# Altium PCB afstandbediening.PcbDoc (part 1 of 2)
Units mm, origin at the board's own origin, x right, y up, seen from the top; angles counter-clockwise.
Board outline 97 x 86 mm, 2 copper layers (Top Layer, Bottom Layer), stack 1.671 mm thick; 45 components, 45 nets, 242 pads, 62 vias.
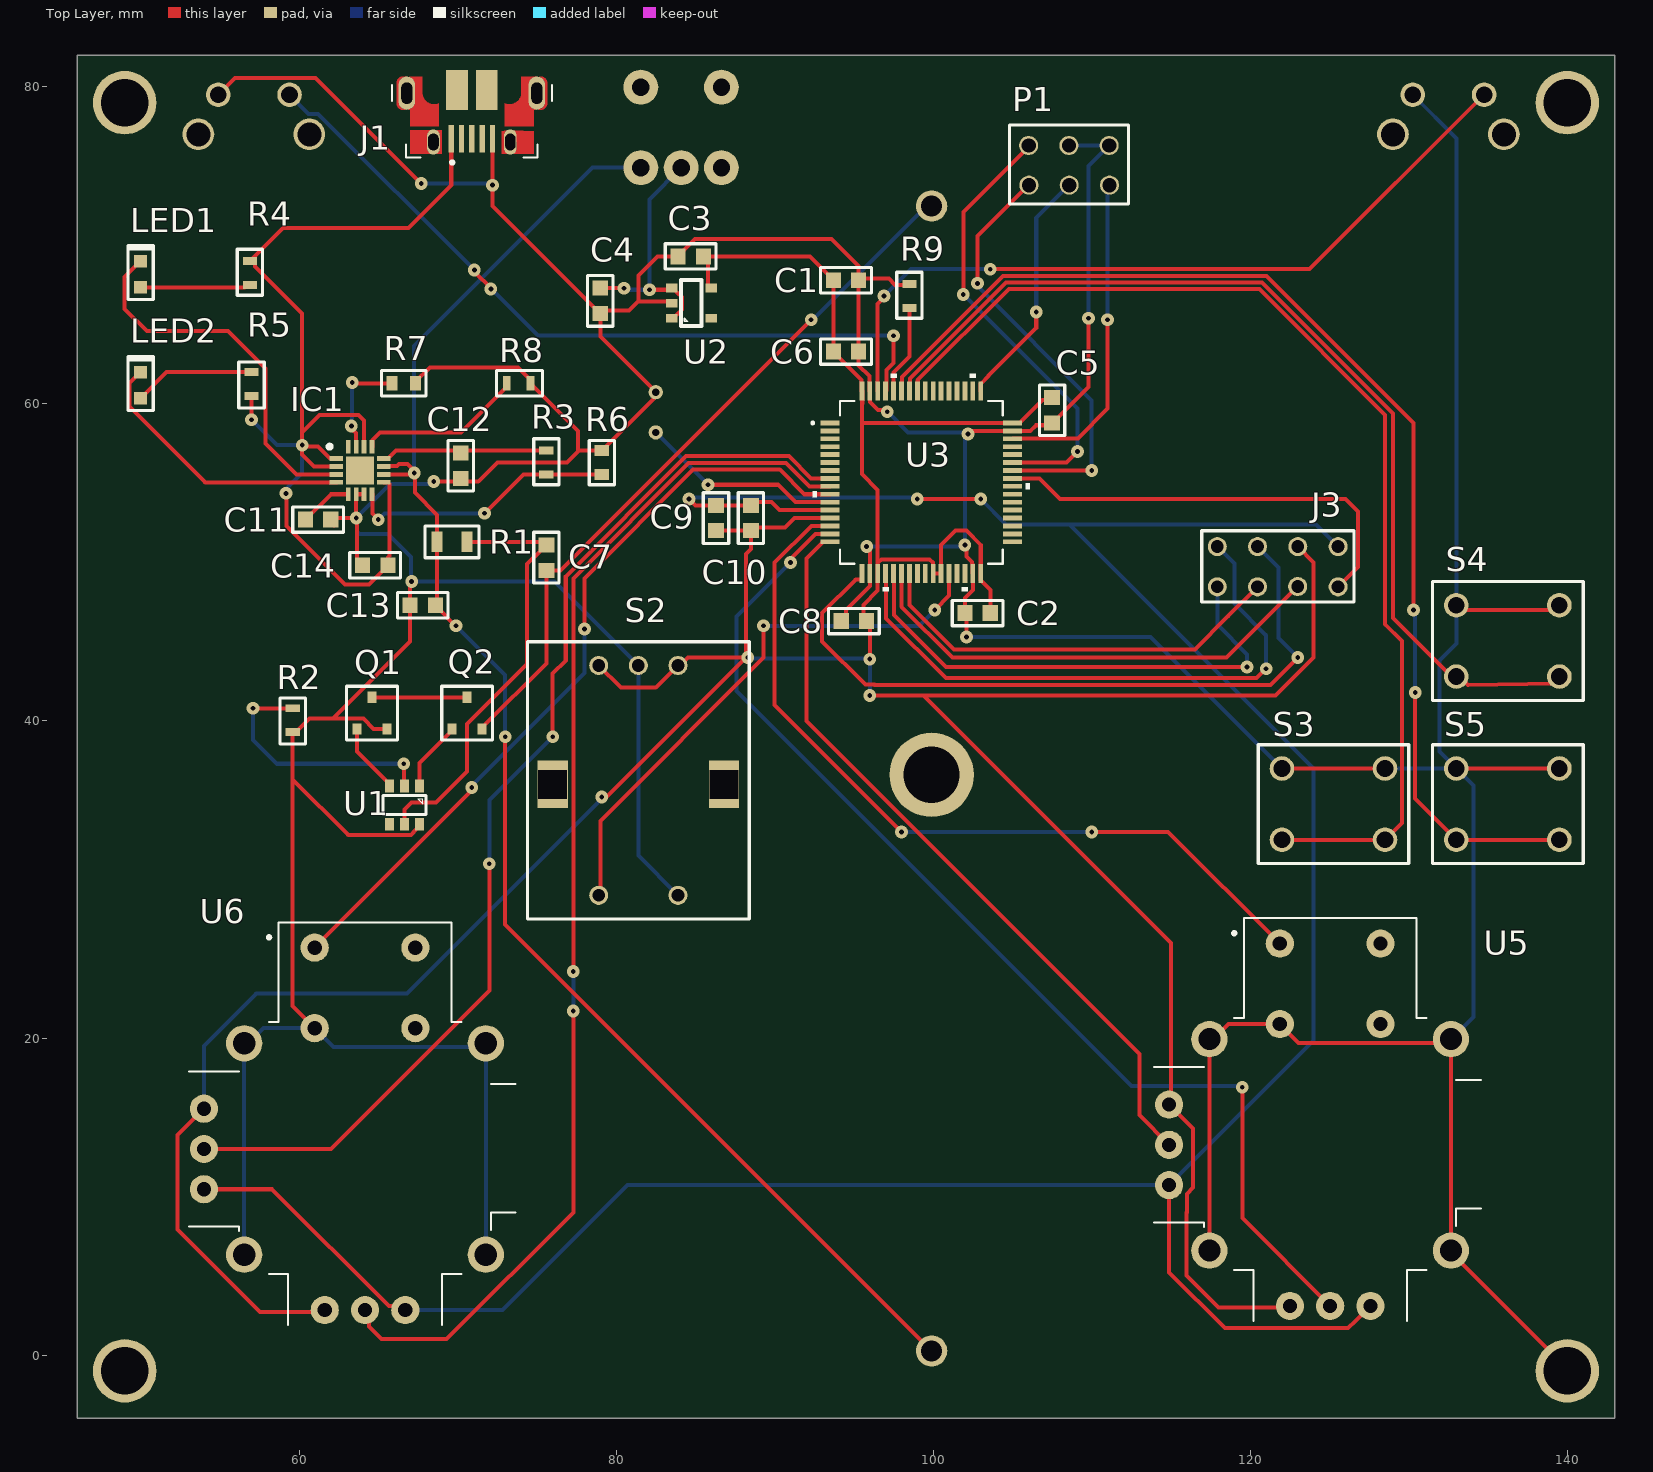
[diagram p0: Top Layer view]
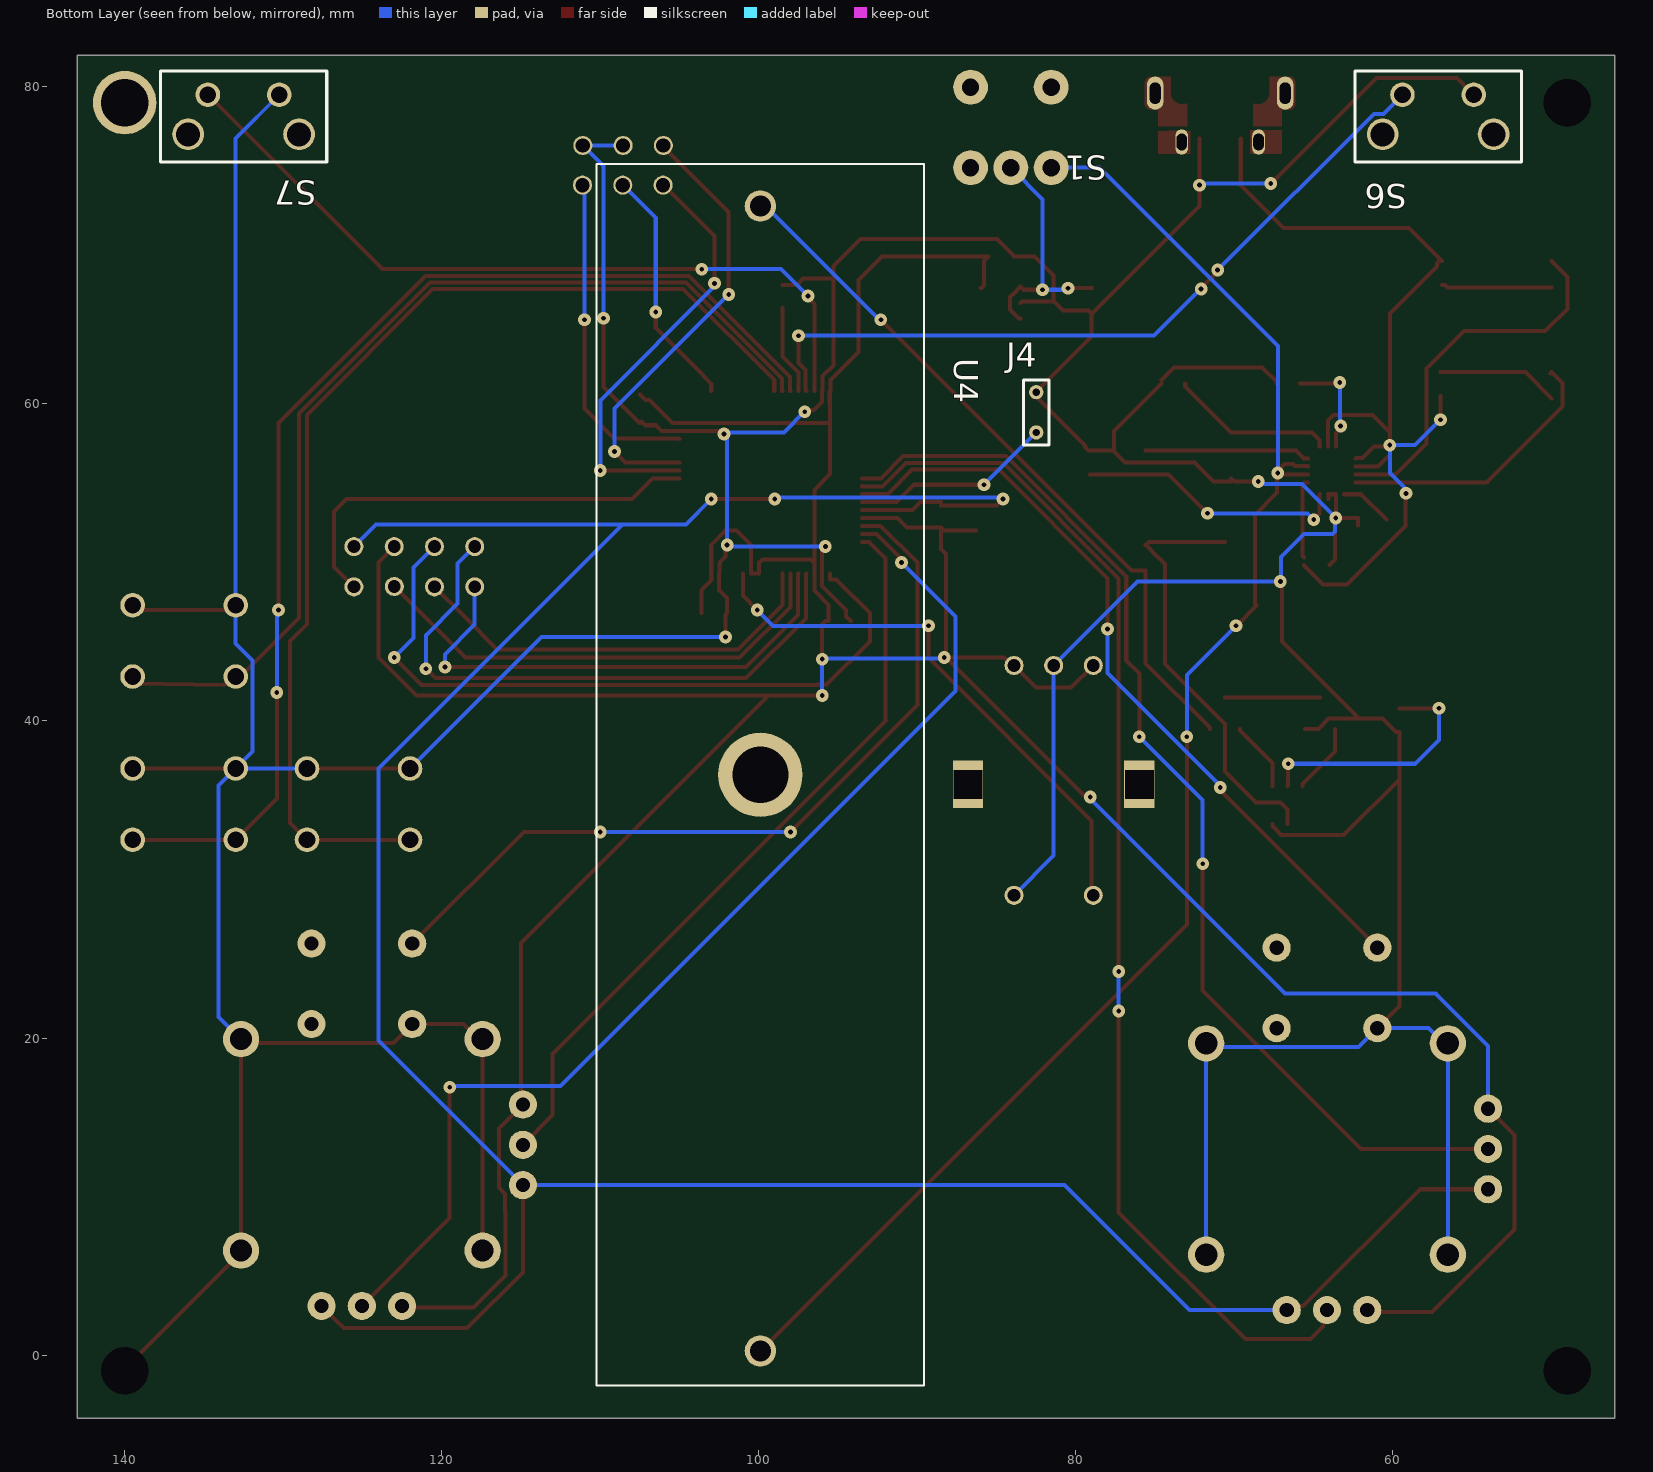
[diagram p1: Bottom Layer view, seen from below]

## Layer stack, top to bottom
Top Solder: solder mask 0.0102, Solder Resist, Dk 3.5
Top Layer: signal copper 0.0356
Dielectric 1: dielectric 1.6, FR-4, Dk 4.8
Bottom Layer: signal copper 0.0356
Bottom Solder: solder mask 0.0102, Solder Resist, Dk 3.5

## Board outline
46,82 143,82 143,-4 142,-4 46,-4

## Design rules (kind name [scope] priority, off if disabled: settings)
Clearance [All] p1: gap=0.168 ignorepadtopadclearanceinfootprint=FALSE
HoleSize [All] p1: absolutevalues=TRUE maxlimit=4 minlimit=0.025 maxpercent=80.000 minpercent=20.000
MinimumSolderMaskSliver [All] p1: minsoldermaskwidth=0.1
PolygonConnect [All] p1: connectstyle=Relief reliefconductorwidth=0.254 reliefentries=4 polygonreliefangle="90 Angle" airgapwidth=0.254
RoutingVias [All] p1: holewidth=0.3 width=0.8 viastyle="Through Hole" minholewidth=0.3 minwidth=0.8 maxholewidth=5 maxwidth=5
SilkToSolderMaskClearance [IsPad] p1: minsilkscreentomaskgap=0.1 clearancetoexposedcopper=TRUE
SolderMaskExpansion [All] p1: expansion=0.102 istentingtop=FALSE
Width [All] p1: maxlimit=5 minlimit=0.168 preferedwidth=0.254
27 further rules are at their usual default settings.

## Components (designator, comment, footprint, x,y, rotation, side; value= is the part's Value field where it differs from the comment)
C1 "4.7µF" 0603 94.5,67.8 r180 top
C2 "0.1µF" 0603 102.8,46.8 r0 top
C3 "1µF" 0603 84.7,69.3 r180 top
C4 "1µF" 0603 79,66.5 r270 top
C5 "0.1µF" 0603 107.5,59.6 r90 top
C6 "0.1µF" 0603 94.5,63.3 r180 top
C7 "0.1µF" 0603 75.6,50.3 r90 top
C8 "0.1µF" 0603 95,46.3 r0 top
C9 "1µF" 0603 86.3,52.8 r270 top
C10 "10nF" 0603 88.5,52.8 r270 top
C11 "10nF" 0603 61.2,52.7 r180 top
C12 "1µF" 0603 70.2,56.1 r90 top
C13 "4.7µF" 0603 67.8,47.3 r0 top
C14 "1µF" 0603 64.8,49.825 r0 top
IC1 "L6924UTR" QFN50P300X300X100-17N-D 63.85,55.8 r0 top
J1 "10103592-0001LF" AMPHENOL_10103592-0001LF 70.9,79.6 r180 top
J3 "NRF connector" "8 PIN RF" 125.54,51 r180 top
J4 "connector piëzo" "M20-9770246 - DUPLICATE" 82.5,58.2 r90 bottom
LED1 "20mA" KP-1608QBC-D 50,68.175 r270 top
LED2 "20mA" KP-1608QBC-D 50,61.175 r270 top
P1 "program connector" M20-9980345 111.12,73.8 r180 top
Q1 "powermosfet" "SI2336DS-T1-GE3 - DUPLICATE" 64.6,39.492 r0 top
Q2 "powermosfet" "SI2336DS-T1-GE3 - DUPLICATE" 70.6,39.492 r0 top
R1 "330ohm" "MCWR08 - DUPLICATE" 69.65,51.3 r180 top
R2 "2.7K" CRCW0603 59.6,40.05 r90 top
R3 "1K" CRCW0603 75.6,56.3 r270 top
R4 "120 ohm" CRCW0603 56.9,68.25 r270 top
R5 "120 ohm" CRCW0603 57,61.25 r90 top
R6 "499ohm" MCWR06 79.1,56.3 r270 top
R7 "24K" MCWR06 66.6,61.3 r0 top
R8 "1K" CRCW0603 73.85,61.3 r180 top
R9 "5Kohm" ERJ-2RK 98.5,66.8 r270 top
S1 "power switch" T101MH9ABE 81.56,79.98 r0 bottom
S2 "rotary encoder" EC11E15244B2 81.4,43.5 r180 top
S3 "switch" B3F-1070 122,32.5 r0 top
S4 "switch" B3F-1070 133,42.8 r0 top
S5 "switch" B3F-1070 133,32.5 r0 top
S6 "90° switch pinker" "B3F-3120 - DUPLICATE" 59.4,79.5 r0 bottom
S7 "90° switch pinker" "B3F-3120 - DUPLICATE" 134.75,79.5 r0 bottom
U1 "safety chip" AP9101CK6-AETRG1 67.6,35.892 r180 top
U2 "LDO" NCP164C 83.5,65.4 r90 top
U3 "STM32F303R8T6" LQFP64-10x10mm 99.25,55.05 r0 top
U4 "1043P" 1043P 99.9,36.6 r90 bottom
U5 "COM-09032" XDCR_COM-09032 125.04,13.26 r0 top
U6 "COM-09032" XDCR_COM-09032 64.16,13 r0 top

## Footprints (in the part's own frame and the unit in brackets; to place one, negate y for a bottom-side part, rotate by r counter-clockwise, add the part's x,y. Pads: shape width x height; smd on the part's side, far side on the other; paste and mask are expansions set on the pad)
"8 PIN RF" [mm]
  round 1.2 hole 0.8: 1(0,2.54) 2(2.55,2.52) 3(5.08,2.54) 4(7.62,2.54) 5(7.62,0) 6(5.08,0) 7(2.54,0) 8(0,0)
  silkscreen extent -1,-1 8.6,3.5
0603 [mm]
  rect 0.95x1 smd: 1(-0.8,0) 2(0.8,0)
  silkscreen extent -1.6,-0.8 1.6,0.8
1043P [mm]
  round 1.98 hole 1.32: 1(-36.34,0) 2(35.88,0)
  round 5.325 hole 3.55: 3(0,0)
  silkscreen extent -38.53,-10.33 38.53,10.33, body extent -38.53,-10.33 38.53,10.33, height 14.1
AMPHENOL_10103592-0001LF [mm]
  rect 0.33x1.75 smd: 1(1.3,2.875) 2(0.65,2.875) 3(0,2.875) 4(-0.65,2.875) 5(-1.3,2.875)
  oval 0.8x1.6 hole 0.65 slot 1.05 at 90 deg: P1(-2.425,3.08) P2(2.425,3.08)
  oval 1.05x2.1 hole 0.7 slot 1.34 at 90 deg: P3(-4.1,0) P6(4.1,0)
  rect 1.375x2.5 smd: P4(-0.937,-0.2) P5(0.937,-0.2)
  Top Layer region: -4.13,1.045 -4.16,1.043 -4.185,1.04 -4.21,1.035 -4.235,1.03 -4.259,1.023 -4.283,1.015 -4.307,1.005 -4.33,0.995 -4.352,0.983 -4.374,0.971 -4.396,0.957 -4.416,0.942 -4.436,0.926 -4.455,0.91 -4.473,0.892 -4.491,0.874 -4.507,0.854 -4.523,0.834 -4.537,0.813 -4.55,0.792 -4.563,0.769 -4.574,0.747 -4.584,0.723 -4.593,0.7 -4.6,0.675 -4.607,0.651 -4.612,0.626 -4.616,0.601 -4.619,0.576 -4.62,0.555 -4.62,-0.525 -4.619,-0.555 -4.617,-0.582 -4.614,-0.608 -4.609,-0.635 -4.602,-0.661 -4.595,-0.687 -4.586,-0.713 -4.575,-0.738 -4.564,-0.762 -4.551,-0.786 -4.537,-0.809 -4.521,-0.832 -4.505,-0.853 -4.487,-0.874 -4.468,-0.893 -4.449,-0.912 -4.428,-0.93 -4.407,-0.946 -4.384,-0.962 -4.361,-0.976 -4.337,-0.989 -4.313,-1 -4.288,-1.011 -4.262,-1.02 -4.236,-1.027 -4.21,-1.034 -4.183,-1.039 -4.157,-1.042 -4.13,-1.044 -4.105,-1.045 -4.105,-1.05 -4.33,-1.05 -4.352,-1.049 -4.374,-1.048 -4.396,-1.045 -4.417,-1.041 -4.439,-1.036 -4.46,-1.029 -4.481,-1.022 -4.501,-1.014 -4.521,-1.004 -4.54,-0.994 -4.559,-0.982 -4.577,-0.97 -4.594,-0.956 -4.611,-0.942 -4.627,-0.927 -4.642,-0.911 -4.656,-0.894 -4.67,-0.877 -4.682,-0.859 -4.694,-0.84 -4.704,-0.821 -4.714,-0.801 -4.722,-0.781 -4.729,-0.76 -4.736,-0.739 -4.741,-0.717 -4.745,-0.696 -4.748,-0.674 -4.749,-0.652 -4.75,-0.63 -4.75,0.63 -4.749,0.652 -4.748,0.674 -4.745,0.696 -4.741,0.717 -4.736,0.739 -4.729,0.76 -4.722,0.781 -4.714,0.801 -4.704,0.821 -4.694,0.84 -4.682,0.859 -4.67,0.877 -4.656,0.894 -4.642,0.911 -4.627,0.927 -4.611,0.942 -4.594,0.956 -4.577,0.97 -4.559,0.982 -4.54,0.994 -4.521,1.004 -4.501,1.014 -4.481,1.022 -4.46,1.029 -4.439,1.036 -4.417,1.041 -4.396,1.045 -4.374,1.048 -4.352,1.049 -4.33,1.05 -4.13,1.05
  Top Layer region: -2.075,0.64 -2.115,0.656 -2.161,0.671 -2.207,0.684 -2.254,0.693 -2.302,0.699 -2.35,0.703 -2.398,0.703 -2.446,0.7 -2.493,0.694 -2.541,0.685 -2.587,0.673 -2.633,0.658 -2.677,0.64 -2.721,0.619 -2.763,0.596 -2.803,0.57 -2.841,0.541 -2.878,0.51 -2.913,0.477 -2.945,0.442 -2.975,0.404 -3.003,0.365 -3.028,0.324 -3.051,0.281 -3.07,0.238 -3.087,0.193 -3.101,0.147 -3.112,0.1 -3.12,0.053 -3.125,0 -3.125,-1.05 -4.06,-1.05 -4.06,-1.045 -4.03,-1.042 -4.005,-1.038 -3.979,-1.032 -3.954,-1.026 -3.93,-1.018 -3.906,-1.009 -3.882,-0.998 -3.859,-0.987 -3.837,-0.975 -3.815,-0.961 -3.794,-0.946 -3.773,-0.931 -3.754,-0.914 -3.735,-0.896 -3.717,-0.878 -3.7,-0.858 -3.684,-0.838 -3.669,-0.817 -3.655,-0.795 -3.642,-0.773 -3.631,-0.75 -3.62,-0.726 -3.611,-0.702 -3.603,-0.678 -3.596,-0.653 -3.59,-0.628 -3.586,-0.603 -3.583,-0.577 -3.581,-0.551 -3.58,-0.53 -3.585,0.555 -3.586,0.576 -3.589,0.601 -3.593,0.626 -3.598,0.651 -3.605,0.675 -3.612,0.7 -3.621,0.723 -3.631,0.747 -3.642,0.769 -3.655,0.792 -3.668,0.813 -3.682,0.834 -3.698,0.854 -3.714,0.874 -3.732,0.892 -3.75,0.91 -3.769,0.926 -3.789,0.942 -3.809,0.957 -3.831,0.971 -3.853,0.983 -3.875,0.995 -3.898,1.005 -3.922,1.015 -3.946,1.023 -3.97,1.03 -3.995,1.035 -4.02,1.04 -4.045,1.043 -4.075,1.045 -4.075,1.05 -3.9,1.05 -3.9,2.1 -2.075,2.1
  Top Layer region: 4.352,1.049 4.374,1.048 4.396,1.045 4.417,1.041 4.439,1.036 4.46,1.029 4.481,1.022 4.501,1.014 4.521,1.004 4.54,0.994 4.559,0.982 4.577,0.97 4.594,0.956 4.611,0.942 4.627,0.927 4.642,0.911 4.656,0.894 4.67,0.877 4.682,0.859 4.694,0.84 4.704,0.821 4.714,0.801 4.722,0.781 4.729,0.76 4.736,0.739 4.741,0.717 4.745,0.696 4.748,0.674 4.749,0.652 4.75,0.63 4.75,-0.63 4.749,-0.652 4.748,-0.674 4.745,-0.696 4.741,-0.717 4.736,-0.739 4.729,-0.76 4.722,-0.781 4.714,-0.801 4.704,-0.821 4.694,-0.84 4.682,-0.859 4.67,-0.877 4.656,-0.894 4.642,-0.911 4.627,-0.927 4.611,-0.942 4.594,-0.956 4.577,-0.97 4.559,-0.982 4.54,-0.994 4.521,-1.004 4.501,-1.014 4.481,-1.022 4.46,-1.029 4.439,-1.036 4.417,-1.041 4.396,-1.045 4.374,-1.048 4.352,-1.049 4.33,-1.05 4.105,-1.05 4.105,-1.045 4.13,-1.044 4.157,-1.042 4.183,-1.039 4.21,-1.034 4.236,-1.027 4.262,-1.02 4.288,-1.011 4.313,-1 4.337,-0.989 4.361,-0.976 4.384,-0.962 4.407,-0.946 4.428,-0.93 4.449,-0.912 4.468,-0.893 4.487,-0.874 4.505,-0.853 4.521,-0.832 4.537,-0.809 4.551,-0.786 4.564,-0.762 4.575,-0.738 4.586,-0.713 4.595,-0.687 4.602,-0.661 4.609,-0.635 4.614,-0.608 4.617,-0.582 4.619,-0.555 4.62,-0.525 4.62,0.555 4.619,0.576 4.616,0.601 4.612,0.626 4.607,0.651 4.6,0.675 4.593,0.7 4.584,0.723 4.574,0.747 4.563,0.769 4.55,0.792 4.537,0.813 4.523,0.834 4.507,0.854 4.491,0.874 4.473,0.892 4.455,0.91 4.436,0.926 4.416,0.942 4.396,0.957 4.374,0.971 4.352,0.983 4.33,0.995 4.307,1.005 4.283,1.015 4.259,1.023 4.235,1.03 4.21,1.035 4.185,1.04 4.16,1.043 4.13,1.045 4.13,1.05 4.33,1.05
  Top Layer region: 3.9,1.05 4.075,1.05 4.075,1.045 4.045,1.043 4.02,1.04 3.995,1.035 3.97,1.03 3.946,1.023 3.922,1.015 3.898,1.005 3.875,0.995 3.853,0.983 3.831,0.971 3.809,0.957 3.789,0.942 3.769,0.926 3.75,0.91 3.732,0.892 3.714,0.874 3.698,0.854 3.682,0.834 3.668,0.813 3.655,0.792 3.642,0.769 3.631,0.747 3.621,0.723 3.612,0.7 3.605,0.675 3.598,0.651 3.593,0.626 3.589,0.601 3.586,0.576 3.585,0.555 3.58,-0.53 3.581,-0.551 3.583,-0.577 3.586,-0.603 3.59,-0.628 3.596,-0.653 3.603,-0.678 3.611,-0.702 3.62,-0.726 3.631,-0.75 3.642,-0.773 3.655,-0.795 3.669,-0.817 3.684,-0.838 3.7,-0.858 3.717,-0.878 3.735,-0.896 3.754,-0.914 3.773,-0.931 3.794,-0.946 3.815,-0.961 3.837,-0.975 3.859,-0.987 3.882,-0.998 3.906,-1.009 3.93,-1.018 3.954,-1.026 3.979,-1.032 4.005,-1.038 4.03,-1.042 4.06,-1.045 4.06,-1.05 3.125,-1.05 3.125,0 3.12,0.053 3.112,0.1 3.101,0.147 3.087,0.193 3.07,0.238 3.051,0.281 3.028,0.324 3.003,0.365 2.975,0.404 2.945,0.442 2.913,0.477 2.878,0.51 2.841,0.541 2.803,0.57 2.763,0.596 2.721,0.619 2.677,0.64 2.633,0.658 2.587,0.673 2.541,0.685 2.493,0.694 2.446,0.7 2.398,0.703 2.35,0.703 2.302,0.699 2.254,0.693 2.207,0.684 2.161,0.671 2.115,0.656 2.075,0.64 2.075,2.1 3.9,2.1
  Top Layer region: 2.2,3.79 2.191,3.785 2.183,3.78 2.175,3.775 2.168,3.77 2.16,3.765 2.153,3.76 2.146,3.754 2.139,3.748 2.132,3.742 2.126,3.736 2.119,3.729 2.113,3.722 2.107,3.716 2.101,3.709 2.096,3.701 2.09,3.694 2.085,3.687 2.08,3.679 2.076,3.671 2.071,3.663 2.067,3.655 2.063,3.647 2.059,3.639 2.056,3.63 2.052,3.622 2.049,3.613 2.046,3.605 2.044,3.596 2.042,3.587 2.04,3.58 2.03,2.61 2.032,2.597 2.035,2.587 2.037,2.576 2.04,2.566 2.044,2.555 2.047,2.545 2.051,2.535 2.055,2.525 2.06,2.515 2.064,2.505 2.069,2.495 2.075,2.486 2.08,2.477 2.086,2.467 2.092,2.458 2.099,2.45 2.105,2.441 2.112,2.433 2.119,2.424 2.127,2.416 2.134,2.408 2.142,2.401 2.15,2.394 2.158,2.386 2.167,2.38 2.175,2.373 2.184,2.367 2.193,2.36 2.202,2.355 2.21,2.35 1.9,2.35 1.9,3.81 2.2,3.81
  Top Layer region: 3.9,2.35 2.61,2.35 2.619,2.354 2.628,2.359 2.637,2.364 2.647,2.37 2.656,2.376 2.665,2.382 2.673,2.388 2.682,2.395 2.69,2.401 2.698,2.408 2.706,2.416 2.714,2.423 2.722,2.431 2.729,2.439 2.736,2.447 2.743,2.455 2.749,2.464 2.755,2.472 2.761,2.481 2.767,2.49 2.773,2.5 2.778,2.509 2.783,2.519 2.788,2.528 2.792,2.538 2.796,2.548 2.8,2.558 2.804,2.568 2.807,2.578 2.81,2.59 2.82,3.55 2.819,3.559 2.817,3.57 2.814,3.58 2.812,3.591 2.809,3.601 2.806,3.611 2.802,3.621 2.799,3.631 2.795,3.641 2.79,3.651 2.786,3.661 2.781,3.67 2.776,3.68 2.77,3.689 2.764,3.698 2.758,3.707 2.752,3.715 2.746,3.724 2.739,3.732 2.732,3.74 2.725,3.748 2.718,3.756 2.71,3.764 2.702,3.771 2.694,3.778 2.686,3.785 2.677,3.791 2.669,3.798 2.66,3.804 2.65,3.81 3.9,3.81
  Top Layer region: -1.9,2.401 -2.21,2.35 -2.193,2.36 -2.175,2.373 -2.158,2.386 -2.142,2.401 -2.127,2.416 -2.112,2.433 -2.099,2.45 -2.086,2.467 -2.075,2.486 -2.064,2.505 -2.055,2.525 -2.047,2.545 -2.04,2.566 -2.035,2.587 -2.03,2.61 -2.04,3.58 -2.044,3.596 -2.049,3.613 -2.056,3.63 -2.063,3.647 -2.071,3.663 -2.08,3.679 -2.09,3.694 -2.101,3.709 -2.113,3.722 -2.126,3.736 -2.139,3.748 -2.153,3.76 -2.168,3.77 -2.183,3.78 -2.2,3.79 -2.2,3.81 -1.9,3.81
  Top Layer region: -2.65,3.81 -2.677,3.791 -2.694,3.778 -2.71,3.764 -2.725,3.748 -2.739,3.732 -2.752,3.715 -2.764,3.698 -2.776,3.68 -2.786,3.661 -2.795,3.641 -2.802,3.621 -2.809,3.601 -2.814,3.58 -2.819,3.559 -2.81,2.59 -2.804,2.568 -2.796,2.548 -2.788,2.528 -2.778,2.509 -2.767,2.49 -2.755,2.472 -2.743,2.455 -2.729,2.439 -2.714,2.423 -2.698,2.408 -2.682,2.395 -2.665,2.382 -2.647,2.37 -2.628,2.359 -2.61,2.35 -3.9,2.395 -3.9,3.81
  silkscreen extent -5.04,-0.5 5.04,4.47
AP9101CK6-AETRG1 [mm]
  rect 0.55x0.8 smd: 1(0,0) 2(0.95,0) 3(1.9,0) 4(1.9,2.4) 5(0.95,2.4) 6(0,2.4)
  silkscreen extent -0.4,0.6 2.3,1.8
B3F-1070 [mm]
  round 1.55 hole 1.05: 1(6.5,0) 2(0,0) 3(6.5,4.5) 4(0,4.5)
  silkscreen extent -1.5,-1.5 8,6
"B3F-3120 - DUPLICATE" [mm]
  round 1.55 hole 1.05: 1(-4.5,0) 2(0,0)
  round 2 hole 1.52: 3(1.25,2.5) 4(-5.75,2.5)
  silkscreen extent -7.5,-1.5 3,4.25
CRCW0603 [mm]
  rect 0.5x0.9 smd: 1(-0.75,0) 2(0.75,0)
  silkscreen extent -1.5,-0.8 1.4,0.8
EC11E15244B2 [mm]
  round 1.2 hole 0.8: 1(-2.5,0) 2(2.5,0) 3(0,0) 4(-2.5,14.5) 5(2.5,14.5)
  rect 1.9x3 hole 1.8 square: 6(5.4,7.5) 7(-5.4,7.5)
  silkscreen extent -7,-1.5 7,16
ERJ-2RK [mm]
  rect 0.5x0.9 smd: 1(-0.75,0) 2(0.75,0)
  silkscreen extent -1.5,-0.8 1.4,0.8
KP-1608QBC-D [mm]
  rect 0.8x0.8 smd: 1(-0.825,0) 2(0.825,0)
  silkscreen extent -1.8,-0.8 1.6,0.8
LQFP64-10x10mm [mm]
  rect 1.194x0.305 smd paste+0 mask+0: 1(-5.75,3.75) 2(-5.75,3.25) 3(-5.75,2.75) 4(-5.75,2.25) 5(-5.75,1.75) 6(-5.75,1.25) 7(-5.75,0.75) 8(-5.75,0.25) 9(-5.75,-0.25) 10(-5.75,-0.75) 11(-5.75,-1.25) 12(-5.75,-1.75) 13(-5.75,-2.25) 14(-5.75,-2.75) 15(-5.75,-3.25) 16(-5.75,-3.75) 33(5.75,-3.75) 34(5.75,-3.25) 35(5.75,-2.75) 36(5.75,-2.25) 37(5.75,-1.75) 38(5.75,-1.25) 39(5.75,-0.75) 40(5.75,-0.25) 41(5.75,0.25) 42(5.75,0.75) 43(5.75,1.25) 44(5.75,1.75) 45(5.75,2.25) 46(5.75,2.75) 47(5.75,3.25) 48(5.75,3.75)
  rect 0.305x1.194 smd paste+0 mask+0: 17(-3.75,-5.75) 18(-3.25,-5.75) 19(-2.75,-5.75) 20(-2.25,-5.75) 21(-1.75,-5.75) 22(-1.25,-5.75) 23(-0.75,-5.75) 24(-0.25,-5.75) 25(0.25,-5.75) 26(0.75,-5.75) 27(1.25,-5.75) 28(1.75,-5.75) 29(2.25,-5.75) 30(2.75,-5.75) 31(3.25,-5.75) 32(3.75,-5.75) 49(3.75,5.75) 50(3.25,5.75) 51(2.75,5.75) 52(2.25,5.75) 53(1.75,5.75) 54(1.25,5.75) 55(0.75,5.75) 56(0.25,5.75) 57(-0.25,5.75) 58(-0.75,5.75) 59(-1.25,5.75) 60(-1.75,5.75) 61(-2.25,5.75) 62(-2.75,5.75) 63(-3.25,5.75) 64(-3.75,5.75)
  silkscreen extent -6.93,-6.85 6.85,6.85, body extent 0,0 0.25,0.25, height 0.25
"M20-9770246 - DUPLICATE" [mm]
  round 0.9 hole 0.46: 1(0,0) 2(2.54,0)
  silkscreen extent -0.8,-0.8 3.3,0.8
M20-9980345 [mm]
  round 1.2 hole 0.9: 1(0,0) 2(2.54,0) 3(5.08,0) 4(5.1,-2.5) 5(2.56,-2.5) 6(0.02,-2.5)
  silkscreen extent -1.2,-3.8 6.3,1.2
MCWR06 [mm]
  rect 0.7x0.9 smd: 1(-0.75,0) 2(0.75,0)
  silkscreen extent -1.4,-0.8 1.4,0.8
"MCWR08 - DUPLICATE" [mm]
  rect 0.7x1.3 smd: 1(-0.95,0) 2(0.95,0)
  silkscreen extent -1.7,-1 1.7,1
NCP164C [mm] "LDO"
  rect 0.56x0.72 smd: 1(0,0) 2(0.95,0) 3(1.9,0) 4(0,-2.5) 5(1.9,-2.5)
  silkscreen extent -0.5,-1.9 2.4,-0.6
QFN50P300X300X100-17N-D [mm]
  rect 0.85x0.3 smd: 1(-1.5,0.75) 2(-1.5,0.25) 3(-1.5,-0.25) 4(-1.5,-0.75) 9(1.5,-0.75) 10(1.5,-0.25) 11(1.5,0.25) 12(1.5,0.75)
  rect 0.3x0.85 smd: 5(-0.75,-1.5) 6(-0.25,-1.5) 7(0.25,-1.5) 8(0.75,-1.5) 13(0.75,1.5) 14(0.25,1.5) 15(-0.25,1.5) 16(-0.75,1.5)
  rect 1.75x1.75 smd: 17(0,0)
  silkscreen extent -2.05,1.38 -1.8,1.62, body extent -1.55,-1.55 1.55,1.55, height 1
"SI2336DS-T1-GE3 - DUPLICATE" [mm]
  rect 0.56x0.72 smd: 1(-0.95,0) 2(0.95,0) 3(0,2)
  silkscreen extent -1.6,-0.7 1.6,2.7
T101MH9ABE [mm]
  round 2.2 hole 1.09: 1(0,5.08) 2(2.54,5.08) 3(5.08,5.08) 4(0,0) 5(5.08,0)
XDCR_COM-09032 [mil]
  round 70 hole 35.43: B1A(-125,500) B1B(125,500) B2A(-125,300) B2B(125,300)
  round 70 hole 35: H1(-100,-400) H2(0,-400) H3(100,-400) V1(-400,100) V2(-400,0) V3(-400,-100)
  round 90 hole 55: S1(-300,262.5) S2(-300,-262.5) S3(300,-262.5) S4(300,262.5)
  silkscreen extent -437,-437 374,563

## Part data
C1 C13: library part 0603ZD475KAT2A, "AVX - 0603ZD475KAT2A - SMD Multilayer Ceramic Capacitor, 4.7 µF, 10 V, 0603 [1608 Metric], ± 10%, X5R, AVX 0603 MLCC", Capacitance=4.7uF, Case Code (Imperial)=0603, Case Code (Metric)=1608, Dielectric=X5R, Manufacturer="Kyocera AVX", Max Operating Temperature=85°C, Min Operating Temperature=-55°C, Package Quantity=1, Supplier Part Number 1=1833806, Tolerance=10%, Voltage=10V, Case/Package=0603, Category="Ceramic Capacitors", ComponentLink1Description=https://datasheet.ciiva.com/1458/1796776-1458211.pdf?src-supplier=Element14, ComponentLink1URL=https://datasheet.ciiva.com/1458/1796776-1458211.pdf?src-supplier=Element14, ComponentLink2Description=https://datasheet.ciiva.com/15212/getdatasheetpartid-179504-15212405.pdf?src-supplier=Verical, ComponentLink2URL=https://datasheet.ciiva.com/15212/getdatasheetpartid-179504-15212405.pdf?src-supplier=Verical, ComponentLink3Description=https://datasheet.ciiva.com/11570/cx5r-11570838.pdf?src-supplier=Avnet, ComponentLink3URL=https://datasheet.ciiva.com/11570/cx5r-11570838.pdf?src-supplier=Avnet, ComponentLink4Description=https://datasheet.ciiva.com/6269/cx5r-6269191.pdf?src-supplier=Digi-Key, ComponentLink4URL=https://datasheet.ciiva.com/6269/cx5r-6269191.pdf?src-supplier=Digi-Key, ComponentLink5Description=https://datasheet.ciiva.com/14905/cx5r-14905225.pdf?src-supplier=Digi-Key, ComponentLink5URL=https://datasheet.ciiva.com/14905/cx5r-14905225.pdf?src-supplier=Digi-Key, ComponentLink6Description=https://datasheet.ciiva.com/7855/1666675-7855114.pdf?src-supplier=Element14, ComponentLink6URL=https://datasheet.ciiva.com/7855/1666675-7855114.pdf?src-supplier=Element14, ComponentLink7Description=https://datasheet.ciiva.com/14905/cx5r-14905226.pdf?src-supplier=Digi-Key, ComponentLink7URL=https://datasheet.ciiva.com/14905/cx5r-14905226.pdf?src-supplier=Digi-Key, ComponentLink8Description=https://datasheet.ciiva.com/7614/cx5r-7614716.pdf?src-supplier=Digi-Key, ComponentLink8URL=https://datasheet.ciiva.com/7614/cx5r-7614716.pdf?src-supplier=Digi-Key, ComponentLink9Description=https://datasheet.ciiva.com/28611/1598274-28611548.pdf?src-supplier=Element14, ComponentLink9URL=https://datasheet.ciiva.com/28611/1598274-28611548.pdf?src-supplier=Element14, ComponentLink10Description=https://datasheet.ciiva.com/22700/1796776-22700575.pdf?src-supplier=Element14, ComponentLink10URL=https://datasheet.ciiva.com/22700/1796776-22700575.pdf?src-supplier=Element14, Construction=Flat, Contact Plating=Tin,Matte, Depth=0.81mm, Dissipation Factor=3.5%, Height=0.9mm, Lead Free="Lead Free", Length=1.6mm, Manufacturer Part Number=0603ZD475KAT2A, Mount="Surface Mount", Number of Pins=2, Packaging="Tape and Reel", Pricing 1="10=0.39800, 100=0.22700, 500=0.14700, 1000=0.11700, 2000=0.09810, 4000=0.08400, 20000=0.05250 (EUR)", Radiation Hardening=No, REACH SVHC="No SVHC", RoHS=Yes, RoHS Compliant=Yes, Series=-, Stock 1=14307, Supplier 1=Farnell, Termination=SMD/SMT, Thickness=0.035inch, Voltage Rating=10V, Voltage Rating (DC)=10V, Width=0.81mm
C2 C5 C6 C7 C8: library part 0603YC104KAT2A, "Cap Ceramic 0.1uF 16V X7R 10% SMD 0603 125C Paper T/R", Capacitance=100nF, Case Code (Imperial)=0603, Case Code (Metric)=1608, Dielectric=X7R, Insulation Resistance=100GR, Manufacturer="Kyocera AVX", Max Operating Temperature=125°C, Min Operating Temperature=-55°C, Package Quantity=1, Supplier Part Number 1=1327679, Tolerance=10%, Voltage=16V, Case/Package=0603, Category="Ceramic Capacitors", ComponentLink1Description=https://datasheet.ciiva.com/11788/0900766b80dc2409-11788525.pdf?src-supplier=RSComponents, ComponentLink1URL=https://datasheet.ciiva.com/11788/0900766b80dc2409-11788525.pdf?src-supplier=RSComponents, ComponentLink2Description=https://datasheet.ciiva.com/1458/84526-1458128.pdf?src-supplier=Element14, ComponentLink2URL=https://datasheet.ciiva.com/1458/84526-1458128.pdf?src-supplier=Element14, ComponentLink3Description=https://datasheet.ciiva.com/1458/84526-1458129.pdf?src-supplier=Element14, ComponentLink3URL=https://datasheet.ciiva.com/1458/84526-1458129.pdf?src-supplier=Element14, ComponentLink4Description=https://datasheet.ciiva.com/150/cx7r-150230.pdf?src-supplier=Digi-Key, ComponentLink4URL=https://datasheet.ciiva.com/150/cx7r-150230.pdf?src-supplier=Digi-Key, ComponentLink5Description=https://datasheet.ciiva.com/28613/683218-28613286.pdf?src-supplier=Element14, ComponentLink5URL=https://datasheet.ciiva.com/28613/683218-28613286.pdf?src-supplier=Element14, ComponentLink6Description=https://datasheet.ciiva.com/150/cx7r-150231.pdf?src-supplier=Digi-Key, ComponentLink6URL=https://datasheet.ciiva.com/150/cx7r-150231.pdf?src-supplier=Digi-Key, ComponentLink7Description=https://datasheet.ciiva.com/150/cx7r-150232.pdf?src-supplier=Digi-Key, ComponentLink7URL=https://datasheet.ciiva.com/150/cx7r-150232.pdf?src-supplier=Digi-Key, ComponentLink8Description=https://datasheet.ciiva.com/5427/cx7r-218113-5427486.pdf?src-supplier=Mouser, ComponentLink8URL=https://datasheet.ciiva.com/5427/cx7r-218113-5427486.pdf?src-supplier=Mouser, ComponentLink9Description=https://datasheet.ciiva.com/14585/70001075-14585102.pdf?src-supplier=Allied+Electronics, ComponentLink9URL=https://datasheet.ciiva.com/14585/70001075-14585102.pdf?src-supplier=Allied+Electronics, ComponentLink10Description=https://datasheet.ciiva.com/11464/cx7r-11464543.pdf?src-supplier=Avnet, ComponentLink10URL=https://datasheet.ciiva.com/11464/cx7r-11464543.pdf?src-supplier=Avnet, Construction=Flat, Contact Plating=Tin,Matte, Depth=0.81mm, Dissipation Factor=3.5%, Height=0.9mm, Lead Free="Lead Free", Length=1.6mm, Manufacturer Part Number=0603YC104KAT2A, Mount="Surface Mount,PCB", Number of Pins=2, Packaging="Tape and Reel", Pricing 1="10=0.06680, 100=0.05510, 500=0.03380, 1000=0.02430, 2000=0.02420, 4000=0.01760, 20000=0.01470 (EUR)", Radiation Hardening=No, REACH SVHC="No SVHC", RoHS=Yes, RoHS Compliant=Yes, Series=-, Stock 1=61599, Supplier 1=Farnell, Termination=SMD/SMT, Thickness=0.035inch, Voltage Rating=16V, Voltage Rating (DC)=16V, Width=0.032inch
C3 C4 C9 C12 C14: library part 0603YD105KAT2A, "AVX - 0603YD105KAT2A - SMD Multilayer Ceramic Capacitor, 1 µF, 16 V, 0603 [1608 Metric], ± 10%, X5R, AVX 0603 MLCC", Capacitance=1uF, Case Code (Imperial)=0603, Case Code (Metric)=1608, Dielectric=X5R, Insulation Resistance=10GR, Manufacturer="Kyocera AVX", Max Operating Temperature=85°C, Min Operating Temperature=-55°C, Package Quantity=1, Supplier Part Number 1=1327680, Tolerance=10%, Voltage=16V, Case/Package=0603, Category="Ceramic Capacitors", ComponentLink1Description=https://datasheet.ciiva.com/11788/0900766b80def1a5-11788563.pdf?src-supplier=RSComponents, ComponentLink1URL=https://datasheet.ciiva.com/11788/0900766b80def1a5-11788563.pdf?src-supplier=RSComponents, ComponentLink2Description=https://datasheet.ciiva.com/34303/2012654-34303835.pdf?src-supplier=Jameco, ComponentLink2URL=https://datasheet.ciiva.com/34303/2012654-34303835.pdf?src-supplier=Jameco, ComponentLink3Description=https://datasheet.ciiva.com/2987/cx5r-2987890.pdf?src-supplier=Avnet, ComponentLink3URL=https://datasheet.ciiva.com/2987/cx5r-2987890.pdf?src-supplier=Avnet, ComponentLink4Description=https://datasheet.ciiva.com/5412/cx5r-5412550.pdf?src-supplier=Mouser, ComponentLink4URL=https://datasheet.ciiva.com/5412/cx5r-5412550.pdf?src-supplier=Mouser, ComponentLink5Description=https://datasheet.ciiva.com/150/cx5r-150392.pdf?src-supplier=Digi-Key, ComponentLink5URL=https://datasheet.ciiva.com/150/cx5r-150392.pdf?src-supplier=Digi-Key, ComponentLink6Description=https://datasheet.ciiva.com/14590/70001028-14590632.pdf?src-supplier=Allied+Electronics, ComponentLink6URL=https://datasheet.ciiva.com/14590/70001028-14590632.pdf?src-supplier=Allied+Electronics, ComponentLink7Description=https://datasheet.ciiva.com/150/cx5r-150393.pdf?src-supplier=Digi-Key, ComponentLink7URL=https://datasheet.ciiva.com/150/cx5r-150393.pdf?src-supplier=Digi-Key, ComponentLink8Description=https://datasheet.ciiva.com/1458/84508-1458137.pdf?src-supplier=Element14, ComponentLink8URL=https://datasheet.ciiva.com/1458/84508-1458137.pdf?src-supplier=Element14, ComponentLink9Description=https://datasheet.ciiva.com/150/cx5r-150394.pdf?src-supplier=Digi-Key, ComponentLink9URL=https://datasheet.ciiva.com/150/cx5r-150394.pdf?src-supplier=Digi-Key, ComponentLink10Description=https://datasheet.ciiva.com/1458/84508-1458138.pdf?src-supplier=Element14, ComponentLink10URL=https://datasheet.ciiva.com/1458/84508-1458138.pdf?src-supplier=Element14, ComponentLink11Description=https://datasheet.ciiva.com/14586/70001028-14586715.pdf?src-supplier=Allied+Electronics, ComponentLink11URL=https://datasheet.ciiva.com/14586/70001028-14586715.pdf?src-supplier=Allied+Electronics, Construction=Flat, Depth=0.81mm, Dissipation Factor=12.5%, Height=0.9mm, Lead Free="Lead Free", Length=1.6mm, Manufacturer Part Number=0603YD105KAT2A, Mount="Surface Mount", Number of Pins=2, Packaging="Tape and Reel", Pricing 1="10=0.07550, 100=0.05170, 500=0.03710, 1000=0.03000, 2000=0.02970, 4000=0.02940, 20000=0.02000 (EUR)", Radiation Hardening=No, REACH SVHC="No SVHC", RoHS=Yes, RoHS Compliant=Yes, Series=-, Stock 1=33961, Supplier 1=Farnell, Termination=SMD/SMT, Thickness=0.035inch, Voltage Rating=16V, Voltage Rating (DC)=16V, Width=0.81mm
C10 C11: library part 0603YC103KAT2A, "AVX - 0603YC103KAT2A - SMD Multilayer Ceramic Capacitor, 10000 pF, 16 V, 0603 [1608 Metric], ± 10%, X7R, AVX 0603 MLCC", Case Code (Imperial)=0603, Case Code (Metric)=1608, Dielectric=X7R, Manufacturer="Kyocera AVX", Max Operating Temperature=125°C, Min Operating Temperature=-55°C, Package Quantity=1, Supplier Part Number 1=2280661, Tolerance=10%, Voltage=16V, Capacitance=10nF, Case/Package=0603, Category="Ceramic Capacitors", ComponentLink1Description=https://datasheet.ciiva.com/150/cx7r-150743.pdf?src-supplier=Digi-Key, ComponentLink1URL=https://datasheet.ciiva.com/150/cx7r-150743.pdf?src-supplier=Digi-Key, ComponentLink2Description=https://datasheet.ciiva.com/22683/1679506-22683367.pdf?src-supplier=Element14, ComponentLink2URL=https://datasheet.ciiva.com/22683/1679506-22683367.pdf?src-supplier=Element14, ComponentLink3Description=https://datasheet.ciiva.com/150/cx7r-150744.pdf?src-supplier=Digi-Key, ComponentLink3URL=https://datasheet.ciiva.com/150/cx7r-150744.pdf?src-supplier=Digi-Key, ComponentLink4Description=https://datasheet.ciiva.com/150/cx7r-150745.pdf?src-supplier=Digi-Key, ComponentLink4URL=https://datasheet.ciiva.com/150/cx7r-150745.pdf?src-supplier=Digi-Key, ComponentLink5Description=https://datasheet.ciiva.com/22699/1679506-22699610.pdf?src-supplier=Element14, ComponentLink5URL=https://datasheet.ciiva.com/22699/1679506-22699610.pdf?src-supplier=Element14, ComponentLink6Description=https://datasheet.ciiva.com/5412/cx7r-218113-5412060.pdf?src-supplier=Mouser, ComponentLink6URL=https://datasheet.ciiva.com/5412/cx7r-218113-5412060.pdf?src-supplier=Mouser, ComponentLink7Description=https://datasheet.ciiva.com/7855/1679506-7855103.pdf?src-supplier=Element14, ComponentLink7URL=https://datasheet.ciiva.com/7855/1679506-7855103.pdf?src-supplier=Element14, ComponentLink8Description=https://datasheet.ciiva.com/16375/cx7r-16375919.pdf?src-supplier=Future+Electronics, ComponentLink8URL=https://datasheet.ciiva.com/16375/cx7r-16375919.pdf?src-supplier=Future+Electronics, Construction=Flat, Depth=0.81mm, Dissipation Factor=3.5%, Lead Free="Lead Free", Length=1.6mm, Manufacturer Part Number=0603YC103KAT2A, Mount="Surface Mount", Packaging="Tape and Reel", Pricing 1="10=0.05050, 100=0.04160, 500=0.03270, 1000=0.02510, 2000=0.02040, 4000=0.01630, 20000=0.01090 (EUR)", Radiation Hardening=No, REACH SVHC="No SVHC", RoHS=Yes, RoHS Compliant=Yes, Series=-, Stock 1=10219, Supplier 1=Farnell, Termination=SMD/SMT, Thickness=0.035inch, Voltage Rating=16V, Voltage Rating (DC)=16V, Width=0.032inch
IC1: "Integrated Circuit", Manufacturer_Name=STMicroelectronics, Mouser2 Part Number=511-L6924UTR, Datasheet Link=https://componentsearchengine.com//L6924UTR.pdf, Height=1mm, Manufacturer_Part_Number=L6924UTR, Mouser2 Price/Stock=https://www.mouser.com/Search/Refine.aspx?Keyword=511-L6924UTR
J1: "USB - micro B USB 2.0 Receptacle Connector 5 Position Surface Mount, Right Angle; Through Hole", Package=None, Availability=Unavailable, MF="Amphenol ICC", MP=10103592-0001LF, Price=None, SnapEDA_Link=https://www.snapeda.com/parts/10103592-0001LF/Amphenol%20FCI/view-part/1274744/?ref=snap
J3: library part "8 pin NRF"
J4: library part M20-9770246, "Conn Unshrouded Header HDR 2 POS 2.54mm Solder ST Thru-Hole Bag", Case/Package=SIL, Color=Black, Contact Resistance=30mR, Current Rating=3A, Manufacturer=Harwin, Max Operating Temperature=105°C, Min Operating Temperature=-40°C, Package Quantity=1000, Supplier Part Number 1=952-1770-ND, Voltage Rating=750V, Category="Headers and Wire Housings", ComponentLink1Description=https://datasheet.ciiva.com/26852/getdatasheetpartid-491110-26852182.pdf?src-supplier=Verical, ComponentLink1URL=https://datasheet.ciiva.com/26852/getdatasheetpartid-491110-26852182.pdf?src-supplier=Verical, ComponentLink2Description=https://datasheet.ciiva.com/5160/m20-977-5160312.pdf?src-supplier=Mouser, ComponentLink2URL=https://datasheet.ciiva.com/5160/m20-977-5160312.pdf?src-supplier=Mouser, Connector Type="Male Pin", Contact Material=Brass, Contact Mating Length=0.228inch, Contact Plating=Tin, Contact Type="Male Pin", Depth=2.54mm, Housing Color=Black, Housing Material=Nylon, Length=5.08mm, Manufacturer Part Number=M20-9770246, Max Current Rating=3A, Mount="Through Hole", Number of Contacts=2, Number of Positions=2, Number of Rows=1, Orientation=Straight, Packaging=Bulk, Pitch=2.54mm, Pricing 1="1=0.12000, 10=0.10900, 25=0.08120, 50=0.06960, 250=0.05808, 750=0.05227, 1000=0.04878, 12000=0.03717, 24000=0.03368 (USD)", Radiation Hardening=No, RoHS=Yes, RoHS Compliant=Yes, Series=M20, Stock 1=87004, Supplier 1=Digi-Key, Termination=Solder
LED1 LED2: library part KP-1608QBC-D, "LED Uni-Color Blue 468nm 2-Pin Chip LED T/R", Case/Package=1608, Color=Blue, Forward Voltage=3.3V, Lens Color=Clear, Manufacturer=Kingbright, Supplier Part Number 1=2146437, Category=LEDs, ComponentLink1Description=https://datasheet.ciiva.com/8060/1655842-8060422.pdf?src-supplier=Element14, ComponentLink1URL=https://datasheet.ciiva.com/8060/1655842-8060422.pdf?src-supplier=Element14, ComponentLink2Description=https://datasheet.ciiva.com/41454/001050379-da-01-en-smd-chipled-bl-0603-kp-1608qbc-d-41454603.pdf?src-supplier=Conrad, ComponentLink2URL=https://datasheet.ciiva.com/41454/001050379-da-01-en-smd-chipled-bl-0603-kp-1608qbc-d-41454603.pdf?src-supplier=Conrad, Dominant Wavelength=470nm, Forward Current=20mA, Height=1.1mm, Length=0.8mm, Lens Style=Diffused,Colorless,Circular,Rectangular, Luminous Intensity=100mcd, Manufacturer Part Number=KP-1608QBC-D, Mount="Surface Mount", Number of LEDs=1, Number of Pins=2, Packaging="Tape and Reel", Pricing 1="5=0.24200, 50=0.18300, 100=0.16000, 500=0.13700, 1000=0.13400 (EUR)", Radiation Hardening=No, REACH SVHC="No SVHC", RoHS=No, RoHS Compliant=No, Series=KP, Stock 1=27050, Supplier 1=Farnell, Viewing Angle=120°, Wavelength=465nm, Width=1.6mm
P1: library part M20-9980345, "HARWIN - M20-9980345 - Board-To-Board Connector, Vertical, 2.54 mm, 6 Contacts, Header, M20 Series, Through Hole, 2 Rows", Color=Black, Contact Resistance=25mR, Current Rating=3A, Insulation Resistance=10GR, Manufacturer=Harwin, Max Operating Temperature=105°C, Min Operating Temperature=-40°C, Package Quantity=1000, Supplier Part Number 1=952-2120-ND, Category="Headers and Wire Housings", ComponentLink1Description=https://datasheet.ciiva.com/6789/91635-6789923.pdf?src-supplier=Newark, ComponentLink1URL=https://datasheet.ciiva.com/6789/91635-6789923.pdf?src-supplier=Newark, ComponentLink2Description=https://datasheet.ciiva.com/11746/0900766b80da602b-11746662.pdf?src-supplier=RSComponents, ComponentLink2URL=https://datasheet.ciiva.com/11746/0900766b80da602b-11746662.pdf?src-supplier=RSComponents, ComponentLink3Description=https://datasheet.ciiva.com/26852/getdatasheetpartid-420465-26852189.pdf?src-supplier=Verical, ComponentLink3URL=https://datasheet.ciiva.com/26852/getdatasheetpartid-420465-26852189.pdf?src-supplier=Verical, ComponentLink4Description=https://datasheet.ciiva.com/6830/m20-998-6830775.pdf?src-supplier=Digi-Key, ComponentLink4URL=https://datasheet.ciiva.com/6830/m20-998-6830775.pdf?src-supplier=Digi-Key, ComponentLink5Description=https://datasheet.ciiva.com/8046/112195-8046904.pdf?src-supplier=Element14, ComponentLink5URL=https://datasheet.ciiva.com/8046/112195-8046904.pdf?src-supplier=Element14, Connector Type="Male Pin", Contact Material=Brass,Bronze, Contact Mating Length=0.24inch, Contact Plating=Gold, Contact Type="Male Pin", Depth=5.08mm, Gender=Male, Height=0.125inch, Housing Color=Black, Housing Material=Nylon, Insulation Material=Polyester, Length=7.62mm, Manufacturer Part Number=M20-9980345, Max Current Rating=3A, Mount="Through Hole", Number of Contacts=6, Number of Positions=6, Number of Rows=2, Orientation=Straight, Packaging=Bag, Pitch=2.54mm, Pricing 1="1=0.29000, 10=0.27300, 100=0.19110, 500=0.16380, 1000=0.13650, 5000=0.11700, 10000=0.10920 (USD)", Radiation Hardening=No, REACH SVHC="No SVHC", RoHS=Yes, RoHS Compliant=Yes, Row Spacing=0.1inch, Series=M20, Stock 1=24477, Supplier 1=Digi-Key, Termination=Solder, Weight=0.125lb, Width=0.25inch
Q1 Q2: library part SI2336DS-T1-GE3, "MOSFET N-CH 30V 5.2A SOT-23", Case/Package=SOT-23, Continuous Drain Current (ID)=5.2A, Drain to Source Resistance=42mR, Drain to Source Voltage (Vdss)=30V, Gate to Source Voltage (Vgs)=8V, Input Capacitance=560pF, Manufacturer="Vishay Siliconix", Max Operating Temperature=150°C, Max Power Dissipation=1.8W, Min Operating Temperature=-55°C, Package Quantity=1, Power Dissipation=1.25W, Supplier Part Number 1=1858945, Threshold Voltage=400mV, Category=MOSFETs, ComponentLink1Description=https://datasheet.ciiva.com/11160/si2336ds-11160912.pdf?src-supplier=Avnet, ComponentLink1URL=https://datasheet.ciiva.com/11160/si2336ds-11160912.pdf?src-supplier=Avnet, ComponentLink2Description=https://datasheet.ciiva.com/4440/si2336ds-260499-4440346.pdf?src-supplier=Mouser, ComponentLink2URL=https://datasheet.ciiva.com/4440/si2336ds-260499-4440346.pdf?src-supplier=Mouser, ComponentLink3Description=https://datasheet.ciiva.com/22697/1915678-22697818.pdf?src-supplier=Element14, ComponentLink3URL=https://datasheet.ciiva.com/22697/1915678-22697818.pdf?src-supplier=Element14, ComponentLink4Description=https://datasheet.ciiva.com/6373/si2336ds-6373839.pdf?src-supplier=Digi-Key, ComponentLink4URL=https://datasheet.ciiva.com/6373/si2336ds-6373839.pdf?src-supplier=Digi-Key, ComponentLink5Description=https://datasheet.ciiva.com/7788/si2336ds-7788767.pdf?src-supplier=Element14, ComponentLink5URL=https://datasheet.ciiva.com/7788/si2336ds-7788767.pdf?src-supplier=Element14, ComponentLink6Description=https://datasheet.ciiva.com/6373/si2336ds-6373836.pdf?src-supplier=Digi-Key, ComponentLink6URL=https://datasheet.ciiva.com/6373/si2336ds-6373836.pdf?src-supplier=Digi-Key, ComponentLink7Description=https://datasheet.ciiva.com/6376/si2336ds-6376271.pdf?src-supplier=Digi-Key, ComponentLink7URL=https://datasheet.ciiva.com/6376/si2336ds-6376271.pdf?src-supplier=Digi-Key, Element Configuration=Single, Fall Time=10ns, Lead Free="Lead Free", Manufacturer Part Number=SI2336DS-T1-GE3, Mount="Surface Mount", Nominal Vgs=400mV, Number of Channels=1, Number of Elements=1, Number of Pins=3, Packaging="Tape and Reel", Polarity=N-CHANNEL, Pricing 1="1=0.51400, 10=0.35200, 100=0.26600, 500=0.21000, 1000=0.18300, 5000=0.15400 (EUR)", Rds On Max=42mR, REACH SVHC="No SVHC", Rise Time=10ns, RoHS=Yes, RoHS Compliant=Yes, Series=TrenchFET®, Stock 1=10813, Supplier 1=Farnell, Turn-Off Delay Time=20ns, Turn-On Delay Time=6ns, Weight=0.050717oz
R1: library part MCWR08X3300FTL, "MULTICOMP         MCWR08X3300FTL            Surface Mount Chip Resistor, Thick Film, MCWR Series, 330 ohm, 125 mW,  1%, 150 V", Case Code (Imperial)=0805, Case Code (Metric)=2012, Manufacturer=Multicomp, Power Rating=125mW, Resistance=330R, Resistor Type="Thick Film", Supplier Part Number 1=2447638, Temperature Coefficient=100ppm/°C, Tolerance=1%, Voltage Rating=150V, Case/Package=0805, Category=Uncategorized, ComponentLink1Description=https://datasheet.ciiva.com/46398/1849611-46398495.pdf?src-supplier=Element14, ComponentLink1URL=https://datasheet.ciiva.com/46398/1849611-46398495.pdf?src-supplier=Element14, Manufacturer Part Number=MCWR08X3300FTL, Mount="Surface Mount", Packaging="Tape and Reel", Pricing 1="10=0.00780, 100=0.00670, 500=0.00560, 1000=0.00410, 2500=0.00340 (EUR)", REACH SVHC=Unknown, RoHS=Yes, Stock 1=107956, Supplier 1=Farnell, Voltage Rating (DC)=150V
R2: library part CRCW06032K70FKEA, "SMD Resistor, Thick film 2.7 kOhm,  ±  1 %, 0603, CRCW06032K70FKEA, Vishay", Case Code (Imperial)=0603, Case Code (Metric)=1608, Manufacturer=Vishay, Max Operating Temperature=155°C, Max Power Dissipation=100mW, Min Operating Temperature=-55°C, Package Quantity=5000, Resistance=2.7kR, Resistance Tolerance=1%, Resistor Type="Thick Film", Supplier Part Number 1=1738910, Temperature Coefficient=100ppm/°C, Voltage Rating=75V, Case/Package=0603, Category="Chip SMD Resistors", ComponentLink1Description=https://datasheet.ciiva.com/11809/0900766b80d98afc-11809070.pdf?src-supplier=RSComponents, ComponentLink1URL=https://datasheet.ciiva.com/11809/0900766b80d98afc-11809070.pdf?src-supplier=RSComponents, ComponentLink2Description=https://datasheet.ciiva.com/5542/dcrcwe3-109170-5542310.pdf?src-supplier=Mouser, ComponentLink2URL=https://datasheet.ciiva.com/5542/dcrcwe3-109170-5542310.pdf?src-supplier=Mouser, ComponentLink3Description=https://datasheet.ciiva.com/7841/1697337-7841580.pdf?src-supplier=Element14, ComponentLink3URL=https://datasheet.ciiva.com/7841/1697337-7841580.pdf?src-supplier=Element14, ComponentLink4Description=https://datasheet.ciiva.com/15225/getdatasheetpartid-32834-15225340.pdf?src-supplier=Verical, ComponentLink4URL=https://datasheet.ciiva.com/15225/getdatasheetpartid-32834-15225340.pdf?src-supplier=Verical, ComponentLink5Description=https://datasheet.ciiva.com/16782/70201119-16782316.pdf?src-supplier=Allied+Electronics, ComponentLink5URL=https://datasheet.ciiva.com/16782/70201119-16782316.pdf?src-supplier=Allied+Electronics, ComponentLink6Description=https://datasheet.ciiva.com/16882/dcrcw-16882972.pdf?src-supplier=Avnet+Europe, ComponentLink6URL=https://datasheet.ciiva.com/16882/dcrcw-16882972.pdf?src-supplier=Avnet+Europe, ComponentLink7Description=https://datasheet.ciiva.com/16204/dcrcwe3-16204333.pdf?src-supplier=Future+Electronics, ComponentLink7URL=https://datasheet.ciiva.com/16204/dcrcwe3-16204333.pdf?src-supplier=Future+Electronics, ComponentLink8Description=https://datasheet.ciiva.com/26314/fld-crcw-e3-data-en-26314702.pdf?src-supplier=Distrelec, ComponentLink8URL=https://datasheet.ciiva.com/26314/fld-crcw-e3-data-en-26314702.pdf?src-supplier=Distrelec, Construction=Rectangular, Contact Plating=Tin,Lead, Depth=0.85mm, Features="Automotive AEC-Q200", Height=0.45mm, Lead Free="Lead Free", Length=1.55mm, Manufacturer Part Number=CRCW06032K70FKEA, Military Standard=Not, Mount="Surface Mount", Number of Pins=2, Number of Terminations=2, Packaging="Tape and Reel", Power Rating=100mW, Pricing 1="10=0.02730, 100=0.01370, 500=0.01000, 1000=0.00630, 2500=0.00540, 5000=0.00480, 25000=0.00420 (EUR)", Radiation Hardening=No, REACH SVHC=Unknown, RoHS=Yes, RoHS Compliant=Yes, Series=CRCW, Stock 1=9990, Supplier 1=Farnell, Technology="THICK FILM", Termination=SMD/SMT, Tolerance=1%, Voltage Rating (DC)=75V, Weight=7.1E-05oz, Width=0.85mm, Working Voltage=75V
R3 R8: library part CRCW06031K00JNEA, "VISHAY - CRCW06031K00JNEA - SMD Chip Resistor, 0603 [1608 Metric], 1 kohm, CRCW e3 Series, 75 V, Thick Film, 100 mW", Case Code (Imperial)=0603, Case Code (Metric)=1608, Manufacturer="Vishay Dale", Max Operating Temperature=155°C, Max Power Dissipation=100mW, Min Operating Temperature=-55°C, Package Quantity=1, Resistance=1kR, Resistance Tolerance=5%, Resistor Type="Thick Film", Supplier Part Number 1=1652851, Temperature Coefficient=200ppm/°C, Voltage Rating=75V, Case/Package=0603, Category="Chip SMD Resistors", ComponentLink1Description=https://datasheet.ciiva.com/2462/dcrcwe3-2462023.pdf?src-supplier=Digi-Key, ComponentLink1URL=https://datasheet.ciiva.com/2462/dcrcwe3-2462023.pdf?src-supplier=Digi-Key, ComponentLink2Description=https://datasheet.ciiva.com/2462/dcrcwe3-2462024.pdf?src-supplier=Digi-Key, ComponentLink2URL=https://datasheet.ciiva.com/2462/dcrcwe3-2462024.pdf?src-supplier=Digi-Key, ComponentLink3Description=https://datasheet.ciiva.com/5548/dcrcwe3-109170-5548152.pdf?src-supplier=Mouser, ComponentLink3URL=https://datasheet.ciiva.com/5548/dcrcwe3-109170-5548152.pdf?src-supplier=Mouser, ComponentLink4Description=https://datasheet.ciiva.com/16515/dcrcwe3-16515080.pdf?src-supplier=Avnet+Asia, ComponentLink4URL=https://datasheet.ciiva.com/16515/dcrcwe3-16515080.pdf?src-supplier=Avnet+Asia, ComponentLink5Description=https://datasheet.ciiva.com/16211/dcrcwe3-16211589.pdf?src-supplier=Future+Electronics, ComponentLink5URL=https://datasheet.ciiva.com/16211/dcrcwe3-16211589.pdf?src-supplier=Future+Electronics, ComponentLink6Description=https://datasheet.ciiva.com/2462/dcrcwe3-2462022.pdf?src-supplier=Digi-Key, ComponentLink6URL=https://datasheet.ciiva.com/2462/dcrcwe3-2462022.pdf?src-supplier=Digi-Key, ComponentLink7Description=https://datasheet.ciiva.com/46441/1533075-46441625.pdf?src-supplier=Element14, ComponentLink7URL=https://datasheet.ciiva.com/46441/1533075-46441625.pdf?src-supplier=Element14, ComponentLink8Description=https://datasheet.ciiva.com/28621/1847332-28621386.pdf?src-supplier=Element14, ComponentLink8URL=https://datasheet.ciiva.com/28621/1847332-28621386.pdf?src-supplier=Element14, Construction=Rectangular, Contact Plating=Tin, Depth=0.85mm, Features="Automotive AEC-Q200", Height=0.02inch, Lead Free="Lead Free", Length=1.55mm, Manufacturer Part Number=CRCW06031K00JNEA, Military Standard=Not, Number of Pins=2, Number of Terminations=2, Packaging="Tape and Reel", Power Rating=100mW, Pricing 1="10=0.02520, 100=0.01160, 500=0.00900, 1000=0.00630, 2500=0.00560, 5000=0.00480, 25000=0.00420 (EUR)", Radiation Hardening=No, REACH SVHC=Unknown, RoHS=Yes, RoHS Compliant=Yes, Series=CRCW, Size Code=0603, Stock 1=180292, Supplier 1=Farnell, Termination=SMD/SMT, Tolerance=5%, Voltage Rating (DC)=75V, Weight=7.1E-05oz, Width=0.033inch
R4 R5: library part CRCW0603120RFKEA, "Res Thick Film 0603 120 Ohm 1% 1/10W ±100ppm/°C Molded SMD Paper T/R", Case Code (Imperial)=0603, Case Code (Metric)=1608, Manufacturer=Vishay, Max Operating Temperature=155°C, Max Power Dissipation=100mW, Min Operating Temperature=-55°C, Package Quantity=10, Resistance=120R, Resistance Tolerance=1%, Resistor Type="Thick Film", Supplier Part Number 1=1652832, Temperature Coefficient=100ppm/°C, Voltage Rating=75V, Case/Package=0603, Category="Chip SMD Resistors", ComponentLink1Description=https://datasheet.ciiva.com/11811/0900766b80d98afc-11811523.pdf?src-supplier=RSComponents, ComponentLink1URL=https://datasheet.ciiva.com/11811/0900766b80d98afc-11811523.pdf?src-supplier=RSComponents, ComponentLink2Description=https://datasheet.ciiva.com/2513/dcrcwe3-2513575.pdf?src-supplier=Digi-Key, ComponentLink2URL=https://datasheet.ciiva.com/2513/dcrcwe3-2513575.pdf?src-supplier=Digi-Key, ComponentLink3Description=https://datasheet.ciiva.com/2513/dcrcwe3-2513576.pdf?src-supplier=Digi-Key, ComponentLink3URL=https://datasheet.ciiva.com/2513/dcrcwe3-2513576.pdf?src-supplier=Digi-Key, ComponentLink4Description=https://datasheet.ciiva.com/26316/fld-crcw-e3-data-en-26316568.pdf?src-supplier=Distrelec, ComponentLink4URL=https://datasheet.ciiva.com/26316/fld-crcw-e3-data-en-26316568.pdf?src-supplier=Distrelec, ComponentLink5Description=https://datasheet.ciiva.com/2513/dcrcwe3-2513577.pdf?src-supplier=Digi-Key, ComponentLink5URL=https://datasheet.ciiva.com/2513/dcrcwe3-2513577.pdf?src-supplier=Digi-Key, ComponentLink6Description=https://datasheet.ciiva.com/5544/dcrcwe3-109170-5544139.pdf?src-supplier=Mouser, ComponentLink6URL=https://datasheet.ciiva.com/5544/dcrcwe3-109170-5544139.pdf?src-supplier=Mouser, ComponentLink7Description=https://datasheet.ciiva.com/7777/1533075-7777275.pdf?src-supplier=Element14, ComponentLink7URL=https://datasheet.ciiva.com/7777/1533075-7777275.pdf?src-supplier=Element14, ComponentLink8Description=https://datasheet.ciiva.com/7777/1697337-7777276.pdf?src-supplier=Element14, ComponentLink8URL=https://datasheet.ciiva.com/7777/1697337-7777276.pdf?src-supplier=Element14, ComponentLink9Description=https://datasheet.ciiva.com/16725/70201119-16725181.pdf?src-supplier=Allied+Electronics, ComponentLink9URL=https://datasheet.ciiva.com/16725/70201119-16725181.pdf?src-supplier=Allied+Electronics, Construction=Rectangular, Contact Plating=Tin, Depth=0.85mm, Features="Automotive AEC-Q200", Height=0.45mm, Lead Free="Lead Free", Length=1.55mm, Manufacturer Part Number=CRCW0603120RFKEA, Military Standard=Not, Mount="Surface Mount", Number of Terminations=2, Packaging="Tape and Reel", Power Rating=100mW, Pricing 1="10=0.02730, 100=0.01530, 500=0.01020, 1000=0.00500, 2500=0.00450, 5000=0.00390, 25000=0.00330 (EUR)", Radiation Hardening=No, REACH SVHC=Unknown, RoHS=Yes, RoHS Compliant=Yes, Series=CRCW, Stock 1=98285, Supplier 1=Farnell, Technology="THICK FILM", Termination=SMD/SMT, Tolerance=1%, Voltage Rating (DC)=75V, Weight=7.1E-05oz, Width=0.033inch, Working Voltage=75V
R6: library part MCWR06X4990FTL, "Res, 499R, 1%, 0.1W, 0603, Thick Film", Manufacturer=Multicomp, Supplier Part Number 1=2694886, Manufacturer Part Number=MCWR06X4990FTL, Pricing 1="10=0.00450, 100=0.00410, 500=0.00370, 1000=0.00330, 2500=0.00240 (EUR)", RoHS=Yes, Stock 1=34389, Supplier 1=Farnell
R7: library part MCWR06X2402FTL, "MULTICOMP - MCWR06X2402FTL - RES, 24K, 1%, 0.1W, THICK FILM", Case Code (Imperial)=0603, Case Code (Metric)=1608, Manufacturer=Multicomp, Power Rating=100mW, Resistance=24kR, Resistor Type="Thick Film", Supplier Part Number 1=2447308, Temperature Coefficient=100ppm/°C, Tolerance=1%, Voltage Rating=50V, Case/Package=0603, ComponentLink1Description=http://www.farnell.com/datasheets/2563624.pdf?src-supplier=Farnell, ComponentLink1URL=http://www.farnell.com/datasheets/2563624.pdf?src-supplier=Farnell, ComponentLink2Description=http://www.farnell.com/datasheets/1849611.pdf?src-supplier=Element14, ComponentLink2URL=http://www.farnell.com/datasheets/1849611.pdf?src-supplier=Element14, Manufacturer Part Number=MCWR06X2402FTL, Packaging="Tape and Reel", Pricing 1="10=0.00510, 100=0.00470, 500=0.00420, 1000=0.00380, 2500=0.00230 (EUR)", REACH SVHC=Unknown, RoHS=Yes, Stock 1=22057, Supplier 1=Farnell, Voltage Rating (DC)=50V